# Altium PCB PCB_Motherboard_V1_2.PcbDoc
Units mm, origin at the board's own origin, x right, y up, seen from the top; angles counter-clockwise.
Board outline 110 x 145 mm, 2 copper layers (Top Layer, Bottom Layer), stack 1.58 mm thick; 101 components, 111 nets, 493 pads, 12 vias.
Unrouted connection lines stored in the file: 328.
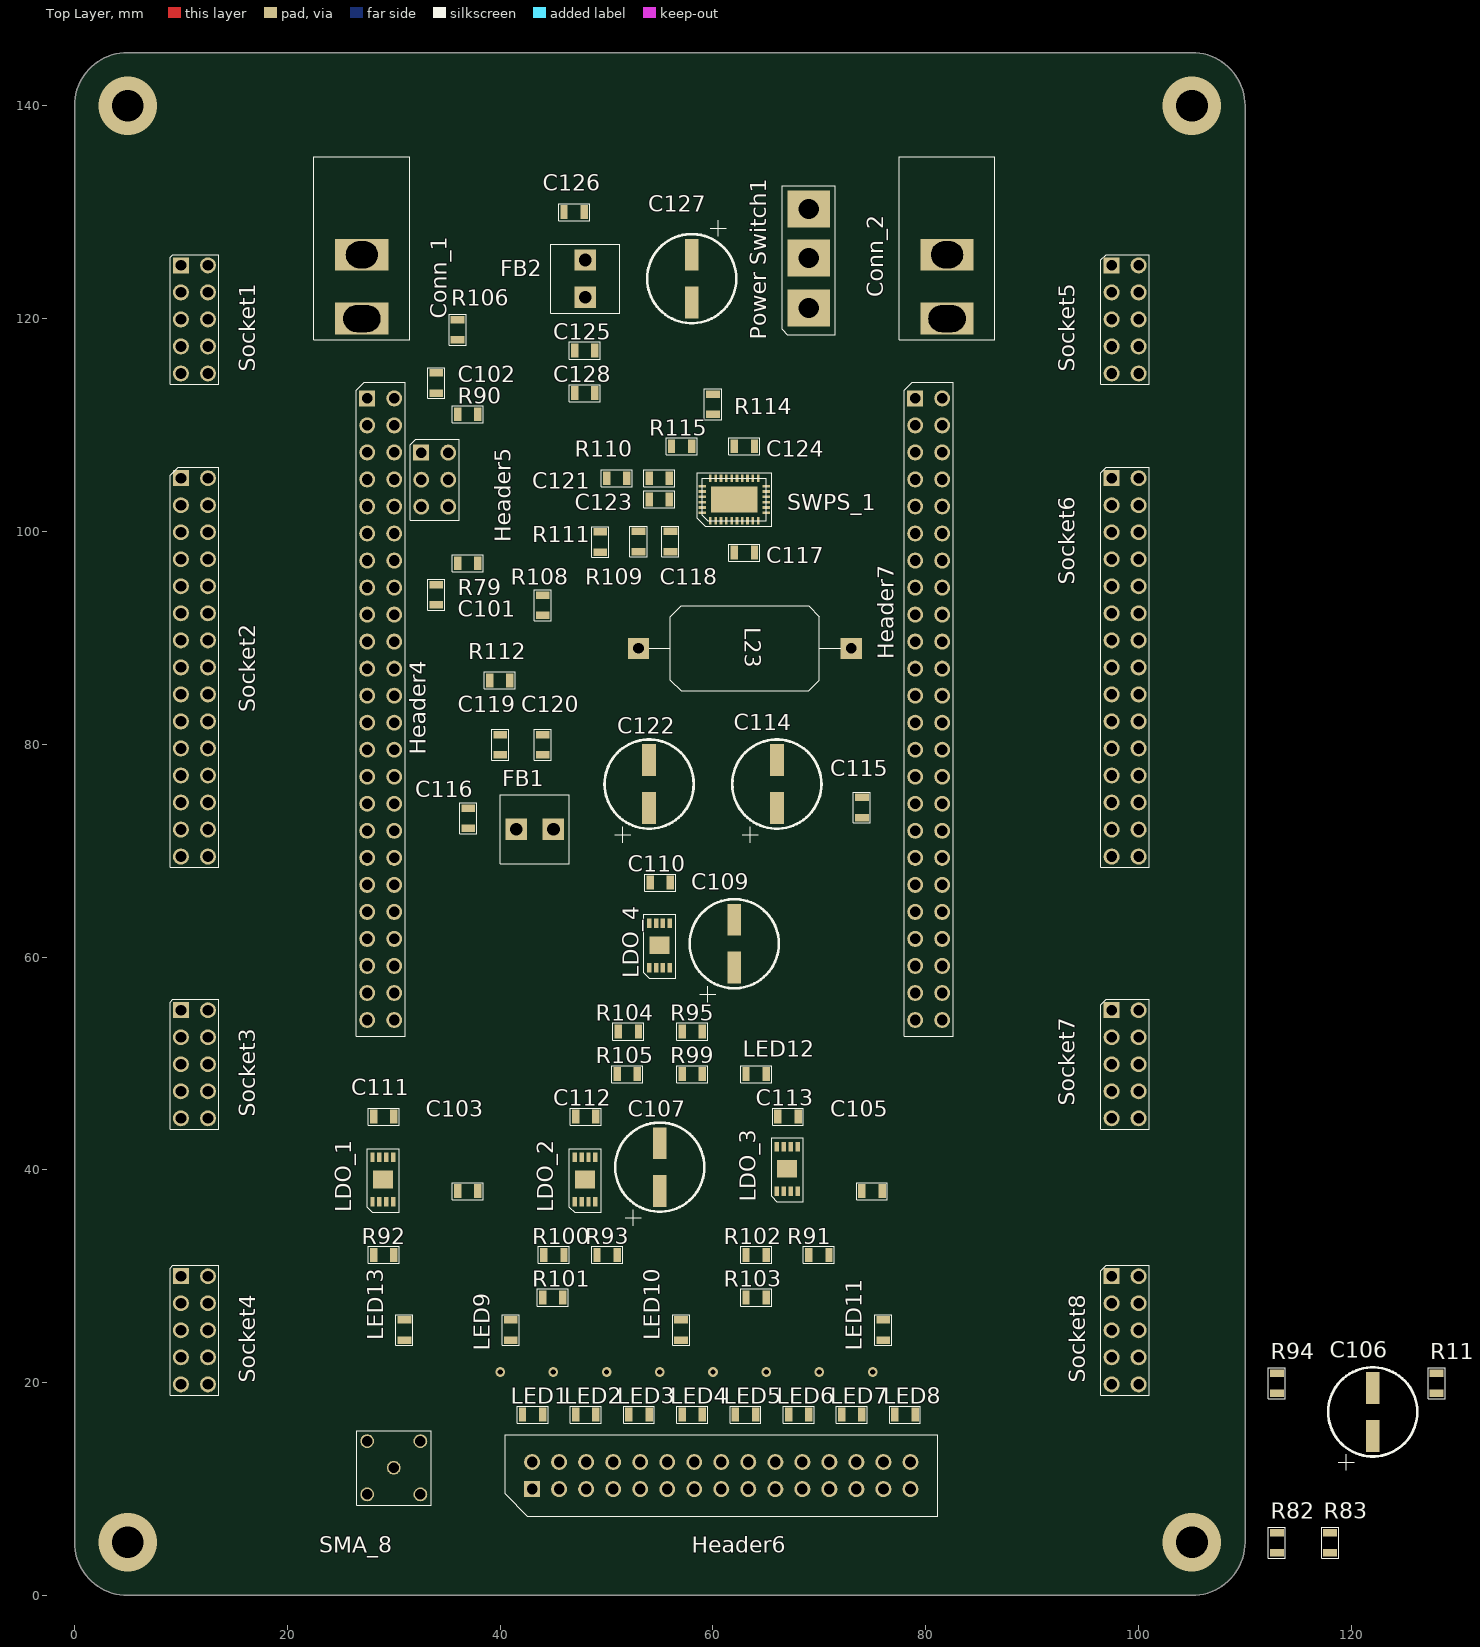
[diagram p0: Top Layer view]
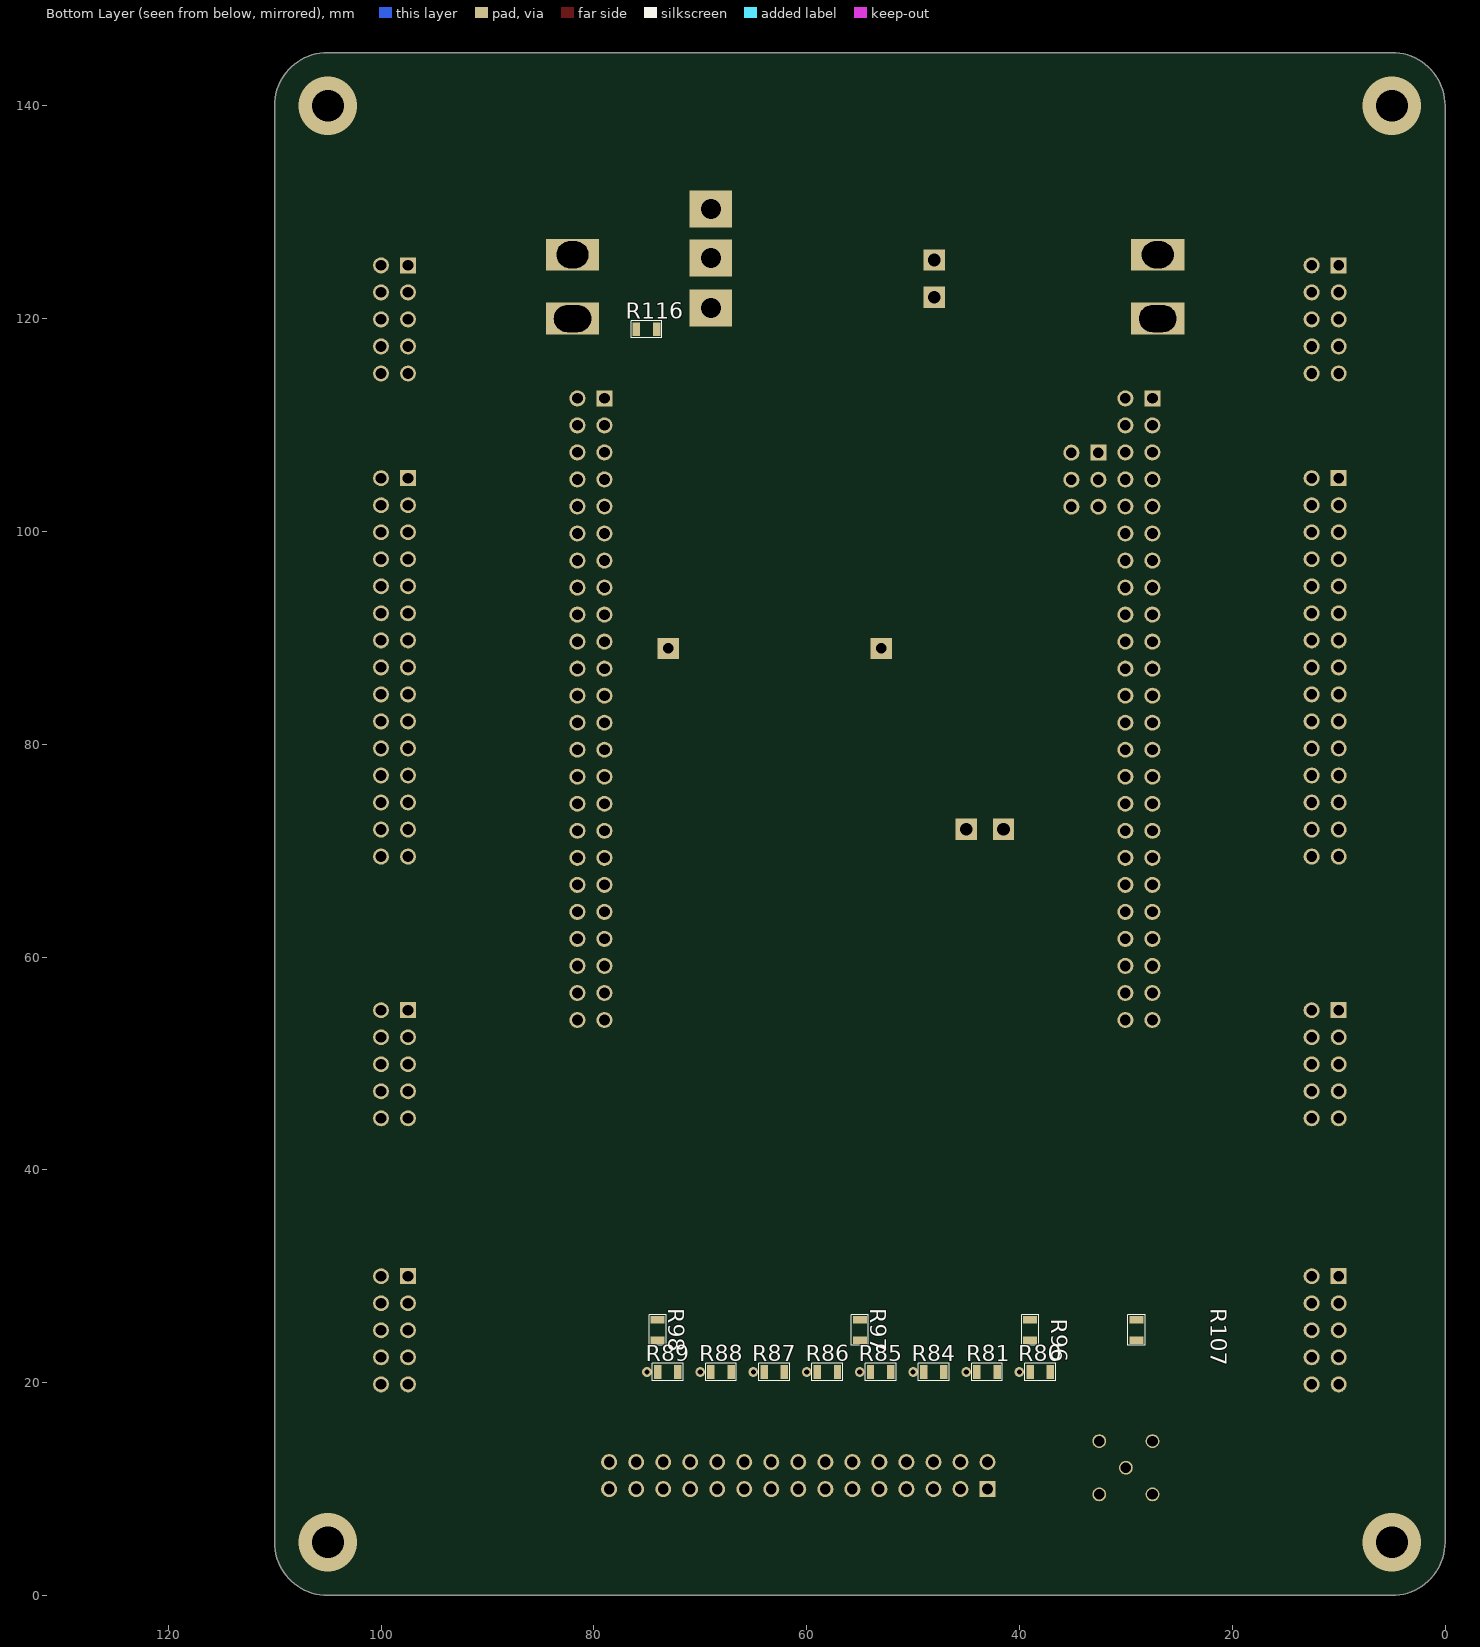
[diagram p1: Bottom Layer view, seen from below]

## Layer stack, top to bottom
Top Solder: solder mask 0.01, Solder Resist, Dk 3.5
Top Layer: signal copper 0.03
Dielectric 1: dielectric 1.52, FR-4, Dk 4.6
Bottom Layer: signal copper 0.03
Bottom Solder: solder mask 0.01, Solder Resist, Dk 3.5

## Board outline
0,5 ccw(c5,5) 5,0 105,0 ccw(c105,5) 110,5 110,140 ccw(c105,140) 105,145 5,145 ccw(c5,140) 0,140

## Design rules (kind name [scope] priority, off if disabled: settings)
Clearance [All] p1: gap=0.18
HoleSize [All] p1: absolutevalues=TRUE maxlimit=6 minlimit=0.3 maxpercent=80.000 minpercent=20.000
MinimumAnnularRing [All] p1: minimumring=0.18
PolygonConnect [All] p1: connectstyle=Relief reliefconductorwidth=0.254 reliefentries=4 polygonreliefangle="90 Angle" airgapwidth=0.254
RoutingTopology [All] p1: topology=Starburst
RoutingVias [All] p1: holewidth=0.4 width=0.8 viastyle="Through Hole" minholewidth=0.2 minwidth=0.52 maxholewidth=6 maxwidth=10
SolderMaskExpansion [All] p1: expansion=0.102
UnpouredPolygon [All] p1: allowunpoured=FALSE
Width [All] p1: maxlimit=10 minlimit=0.15 preferedwidth=0.3
27 further rules are at their usual default settings.

## Classes and differential pairs
net class DAC_DataBus: H_DAC_CLOCK H_DAC_DB0 H_DAC_DB1 H_DAC_DB2 H_DAC_DB3 H_DAC_DB4 H_DAC_DB5 H_DAC_DB6 H_DAC_DB7 H_DAC_DB8 H_DAC_DB9 H_DAC_DB10 H_DAC_DB11 H_DAC_DB12 H_DAC_DB13
net class ADC_DataBus: H_ADC_CLK H_ADC_D0 H_ADC_D1 H_ADC_D2 H_ADC_D3 H_ADC_D4 H_ADC_D5 H_ADC_D6 H_ADC_D7 H_ADC_D8 H_ADC_D9 H_ADC_D10
component class MotherBoard_PowerSupply: C103 C105 C107 C109 C110 C111 C112 C113 C114 C115 C116 C117 C118 C119 C120 C121 C122 C123 C124 C125 C126 C127 C128 Conn_1 Conn_2 FB1 FB2 L23 LDO_1 LDO_2 LDO_3 LDO_4 LED9 LED10 LED11 LED12 LED13 "Power Switch1" R91 R92 R93 R95 R96 R97 R98 R99 R100 R101 R102 R103 R104 R105 R106 R107 R108 R109 R110 R111 R112 R114 R115 R116 SWPS_1
component class MotherBoard_Interconnect: C101 C102 C103 C105 Header4 Header5 Header6 Header7 LED1 LED2 LED3 LED4 LED5 LED6 LED7 LED8 R79 R80 R81 R84 R85 R86 R87 R88 R89 R90 R91 SMA_8 Socket1 Socket2 Socket3 Socket4 Socket5 Socket6 Socket7 Socket8

## Components (designator, comment, footprint, x,y, rotation, side; value= is the part's Value field where it differs from the comment)
C101 "Cap1" "0805 SMD Passive" 34,95 r270 top
C102 "Cap1" "0805 SMD Passive" 34,113 r90 top
C103 "Cap1" "0805 SMD Passive" 36,38 r0 top
C105 "Cap1" "0805 SMD Passive" 74,38 r0 top
C106 "Cap2" ELKO_CAP 122,15 r0 top
C107 "Cap2" ELKO_CAP 55,38 r0 top
C109 "Cap2" ELKO_CAP 62,59 r0 top
C110 "Cap1" "0805 SMD Passive" 56,67 r180 top
C111 "Cap1" "0805 SMD Passive" 30,45 r180 top
C112 "Cap1" "0805 SMD Passive" 49,45 r180 top
C113 "Cap1" "0805 SMD Passive" 68,45 r180 top
C114 "Cap2" ELKO_CAP 66,74 r0 top
C115 "Cap1" "0805 SMD Passive" 74,75 r270 top
C116 "Cap1" "0805 SMD Passive" 37,74 r270 top
C117 "Cap1" "0805 SMD Passive" 62,98 r0 top
C118 "Cap1" "0805 SMD Passive" 56,100 r270 top
C119 "Cap1" "0805 SMD Passive" 40,79 r90 top
C120 "Cap1" "0805 SMD Passive" 44,79 r90 top
C121 "Cap1" "0805 SMD Passive" 50,105 r0 top
C122 "Cap2" ELKO_CAP 54,74 r0 top
C123 "Cap1" "0805 SMD Passive" 54,103 r0 top
C124 "Cap1" "0805 SMD Passive" 62,108 r0 top
C125 "Cap1" "0805 SMD Passive" 47,117 r0 top
C126 "Cap1" "0805 SMD Passive" 46,130 r0 top
C127 "Cap2" ELKO_CAP 58,126 r180 top
C128 "Cap1" "0805 SMD Passive" 47,113 r0 top
Conn_1 "DC_Connector" DC_Connector 27,120 r270 top
Conn_2 "DC_Connector" DC_Connector 82,120 r270 top
FB1 "Ferrit Bead" FerritBead 45,72 r90 top
FB2 "Ferrit Bead" FerritBead 48,122 r0 top
Header4 "Header2" Header2 27.5,112.5 r270 top
Header5 "Header4" Header4 32.58,107.4 r270 top
Header6 "Header1" Header1 43,10 r0 top
Header7 "Header2" Header2 79,112.5 r270 top
L23 "Inductor" THD_INDUCTOR 53,89 r0 top
LDO_1 "LTI1965" LT1965 28,37 r0 top
LDO_2 "LTI1965" LT1965 47,37 r0 top
LDO_3 "LTI1965" LT1965 66,38 r0 top
LDO_4 "LTI1965" LT1965 54,59 r0 top
LED1 "LED_Green" "0805 SMD Passive" 44,17 r180 top
LED2 "LED_Green" "0805 SMD Passive" 49,17 r180 top
LED3 "LED_Green" "0805 SMD Passive" 54,17 r180 top
LED4 "LED_Green" "0805 SMD Passive" 59,17 r180 top
LED5 "LED_Green" "0805 SMD Passive" 64,17 r180 top
LED6 "LED_Green" "0805 SMD Passive" 69,17 r180 top
LED7 "LED_Green" "0805 SMD Passive" 74,17 r180 top
LED8 "LED_Green" "0805 SMD Passive" 79,17 r180 top
LED9 "LED_Green" "0805 SMD Passive" 41,24 r90 top
LED10 "LED_Green" "0805 SMD Passive" 57,24 r90 top
LED11 "LED_Green" "0805 SMD Passive" 76,24 r90 top
LED12 "LED_Green" "0805 SMD Passive" 65,49 r180 top
LED13 "LED_Green" "0805 SMD Passive" 31,24 r90 top
"Power Switch1" "Switch" Switch 69,121 r0 top
R79 "Resistor" "0805 SMD Passive" 36,97 r0 top
R80 "Resistor" "0805 SMD Passive" 37.1,21 r0 bottom
R81 "Resistor" "0805 SMD Passive" 44,21 r180 bottom
R82 "Resistor" "0805 SMD Passive" 113,4 r90 top
R83 "Resistor" "0805 SMD Passive" 118,4 r90 top
R84 "Resistor" "0805 SMD Passive" 47.1,21 r0 bottom
R85 "Resistor" "0805 SMD Passive" 52.1,21 r0 bottom
R86 "Resistor" "0805 SMD Passive" 57.1,21 r0 bottom
R87 "Resistor" "0805 SMD Passive" 62.1,21 r0 bottom
R88 "Resistor" "0805 SMD Passive" 67.1,21 r0 bottom
R89 "Resistor" "0805 SMD Passive" 72.1,21 r0 bottom
R90 "Resistor" "0805 SMD Passive" 36,111 r0 top
R91 "Resistor" "0805 SMD Passive" 69,32 r0 top
R92 "Resistor" "0805 SMD Passive" 30,32 r180 top
R93 "Resistor" "0805 SMD Passive" 51,32 r180 top
R94 "Resistor" "0805 SMD Passive" 113,19 r90 top
R95 "Resistor" "0805 SMD Passive" 59,53 r180 top
R96 "Resistor" "0805 SMD Passive" 39,24 r90 bottom
R97 "Resistor" "0805 SMD Passive" 55,24 r90 bottom
R98 "Resistor" "0805 SMD Passive" 74,24 r90 bottom
R99 "Resistor" "0805 SMD Passive" 59,49 r180 top
R100 "Resistor" "0805 SMD Passive" 46,32 r180 top
R101 "Resistor" "0805 SMD Passive" 44,28 r0 top
R102 "Resistor" "0805 SMD Passive" 65,32 r180 top
R103 "Resistor" "0805 SMD Passive" 65,28 r180 top
R104 "Resistor" "0805 SMD Passive" 53,53 r180 top
R105 "Resistor" "0805 SMD Passive" 51,49 r0 top
R106 "Resistor" "0805 SMD Passive" 36,118 r90 top
R107 "Resistor" "0805 SMD Passive" 29,24 r90 bottom
R108 "Resistor" "0805 SMD Passive" 44,94 r270 top
R109 "Resistor" "0805 SMD Passive" 53,100 r270 top
R110 "Resistor" "0805 SMD Passive" 54,105 r0 top
R111 "Resistor" "0805 SMD Passive" 49.4,99.95 r270 top
R112 "Resistor" "0805 SMD Passive" 39,86 r0 top
R113 "Resistor" "0805 SMD Passive" 128,19 r90 top
R114 "Resistor" "0805 SMD Passive" 60,111 r90 top
R115 "Resistor" "0805 SMD Passive" 58,108 r180 top
R116 "Resistor" "0805 SMD Passive" 76,119 r180 bottom
SMA_8 "SMA_2" SMA_Board 30,12 r0 top
Socket1 "Socket3" Socket3_L 10,125 r270 top
Socket2 "Socket1" Socket1_L 10,105 r270 top
Socket3 "Socket3" Socket3_L 10,55 r270 top
Socket4 "Socket3" Socket3_L 10,30 r270 top
Socket5 "Socket3" Socket3_R 100,125 r270 top
Socket6 "Socket1" Socket1_R 100,105 r270 top
Socket7 "Socket3" Socket3_R 100,55 r270 top
Socket8 "Socket3" Socket3_R 100,30 r270 top
SWPS_1 "LT8646S" LT8646S 62,103 r0 top

## Footprints (in the part's own frame and the unit in brackets; to place one, negate y for a bottom-side part, rotate by r counter-clockwise, add the part's x,y. Pads: shape width x height; smd on the part's side, far side on the other; paste and mask are expansions set on the pad)
"0805 SMD Passive" [mm] "General 0805 SMD componenet footprint"
  rect 0.7x1.3 smd: 1(0,0) 2(1.9,0)
  silkscreen extent -0.5,-0.8 2.4,0.8, body extent -0.2,-0.6 2.1,0.6, height 0.45
DC_Connector [mm] "Power Connector"
  rect 3x5 hole 2.54 slot 3.5 at 90 deg: 1(0,0)
  rect 3x5 hole 2.54 slot 3 at 90 deg: 2(-6,0)
  silkscreen extent -15.2,-4.5 2,4.5, body extent -15.2,-4.5 0.5,4.5, height 10.46
ELKO_CAP [mm] "Electrolit SMD capacitor"
  rect 1.3x3 smd: 1(0,0) 2(0,4.5)
  silkscreen extent -4.19,-3.25 4.19,6.44, body extent -2.48,0.01 2.5,5, height 5.4
FerritBead [mm] "THD"
  rect 2x2 hole 1.2: 1(0,0) 2(0,3.5)
  silkscreen extent -3.25,-1.5 3.25,5, body extent -2.98,-1.24 3,4.74, height 10
Header1 [mm] "30-Pin DIL"
  rect 1.5x1.5 hole 1: 1(0,0)
  round 1.5 hole 1: 2(0,2.54) 3(2.54,0) 4(2.54,2.54) 5(5.08,0) 6(5.08,2.54) 7(7.62,0) 8(7.62,2.54) 9(10.16,0) 10(10.16,2.54) 11(12.7,0) 12(12.7,2.54) 13(15.24,0) 14(15.24,2.54) 15(17.78,0) 16(17.78,2.54) 17(20.32,0) 18(20.32,2.54) 19(22.86,0) 20(22.86,2.54) 21(25.4,0) 22(25.4,2.54) 23(27.94,0) 24(27.94,2.54) 25(30.48,0) 26(30.48,2.54) 27(33.02,0) 28(33.02,2.54) 29(35.56,0) 30(35.56,2.54)
  silkscreen extent -2.54,-2.54 38.1,5.08, body extent -1.5,-2 37.5,4.5, height 8
Header2 [mm] "48-Pin DIL"
  rect 1.5x1.5 hole 1: 1(0,0)
  round 1.5 hole 1: 2(2.54,0) 3(5.08,0) 4(7.62,0) 5(10.16,0) 6(12.7,0) 7(15.24,0) 8(17.78,0) 9(20.32,0) 10(22.86,0) 11(25.4,0) 12(27.94,0) 13(30.48,0) 14(33.02,0) 15(35.56,0) 16(38.1,0) 17(40.64,0) 18(43.18,0) 19(45.72,0) 20(48.26,0) 21(50.8,0) 22(53.34,0) 23(55.88,0) 24(58.42,0) 25(0,2.54) 26(2.54,2.54) 27(5.08,2.54) 28(7.62,2.54) 29(10.16,2.54) 30(12.7,2.54) 31(15.24,2.54) 32(17.78,2.54) 33(20.32,2.54) 34(22.86,2.54) 35(25.4,2.54) 36(27.94,2.54) 37(30.48,2.54) 38(33.02,2.54) 39(35.56,2.54) 40(38.1,2.54) 41(40.64,2.54) 42(43.18,2.54) 43(45.72,2.54) 44(48.26,2.54) 45(50.8,2.54) 46(53.34,2.54) 47(55.88,2.54) 48(58.42,2.54)
  silkscreen extent -1.5,-1.02 59.94,3.56, body extent -1.5,-1.02 60,3.56, height 8
Header4 [mm] "6-Pin DIL"
  rect 1.5x1.5 hole 1: 1(0,0)
  round 1.5 hole 1: 2(0,2.54) 3(2.54,0) 4(2.54,2.54) 5(5.08,0) 6(5.08,2.54)
  silkscreen extent -1.27,-1.02 6.35,3.56, body extent -1.27,-1.02 6.35,3.56, height 8
LT1965 [mm] "MSOP-8"
  rect 0.42x0.89 smd: 1(0,0) 2(0.65,0) 3(1.3,0) 4(1.95,0) 5(1.95,4.19) 6(1.3,4.19) 7(0.65,4.19) 8(0,4.19)
  rect 1.88x1.68 smd: 9(0.975,2.1)
  silkscreen extent -0.5,-1 2.5,5, body extent -0.1,0.7 2,3.4, height 1.5
LT8646S [mm] "LQFN-32"
  rect 0.25x0.7 smd: 1(-2.25,-2) 2(-1.75,-2) 3(-1.25,-2) 4(-0.75,-2) 5(-0.25,-2) 6(0.25,-2) 7(0.75,-2) 8(1.25,-2) 9(1.75,-2) 10(2.25,-2) 17(2.25,2) 18(1.75,2) 19(1.25,2) 20(0.75,2) 21(0.25,2) 22(-0.25,2) 23(-0.75,2) 24(-1.25,2) 25(-1.75,2) 26(-2.25,2)
  rect 0.7x0.25 smd: 11(3,-1.25) 12(3,-0.75) 13(3,-0.25) 14(3,0.25) 15(3,0.75) 16(3,1.25) 27(-3,1.25) 28(-3,0.75) 29(-3,0.25) 30(-3,-0.25) 31(-3,-0.75) 32(-3,-1.25)
  rect 4.4x2.45 smd: 33(0,0)
  silkscreen extent -3.5,-2.5 3.5,2.5, body extent -3,-2 3,2, height 0.2
SMA_Board [mm] "SMD THD connector"
  round 1.3 hole 1: 1(0,0) 2(-2.5,-2.5) 2(-2.5,2.5) 2(2.5,-2.5) 2(2.5,2.5)
  silkscreen extent -3.5,-3.5 3.5,3.5, body extent -3.5,-3.5 3.5,3.5, height 8
Socket1_L [mm] "30-Pin DIL"
  rect 1.5x1.5 hole 1: 1(0,0)
  round 1.5 hole 1: 2(0,2.54) 3(2.54,0) 4(2.54,2.54) 5(5.08,0) 6(5.08,2.54) 7(7.62,0) 8(7.62,2.54) 9(10.16,0) 10(10.16,2.54) 11(12.7,0) 12(12.7,2.54) 13(15.24,0) 14(15.24,2.54) 15(17.78,0) 16(17.78,2.54) 17(20.32,0) 18(20.32,2.54) 19(22.86,0) 20(22.86,2.54) 21(25.4,0) 22(25.4,2.54) 23(27.94,0) 24(27.94,2.54) 25(30.48,0) 26(30.48,2.54) 27(33.02,0) 28(33.02,2.54) 29(35.56,0) 30(35.56,2.54)
  silkscreen extent -1.02,-1.02 36.58,3.56, body extent -1.02,-1.02 36.58,3.56, height 6
Socket1_R [mm] "30-Pin DIL"
  rect 1.5x1.5 hole 1: 1(0,-2.54)
  round 1.5 hole 1: 2(0,0) 3(2.54,-2.54) 4(2.54,0) 5(5.08,-2.54) 6(5.08,0) 7(7.62,-2.54) 8(7.62,0) 9(10.16,-2.54) 10(10.16,0) 11(12.7,-2.54) 12(12.7,0) 13(15.24,-2.54) 14(15.24,0) 15(17.78,-2.54) 16(17.78,0) 17(20.32,-2.54) 18(20.32,0) 19(22.86,-2.54) 20(22.86,0) 21(25.4,-2.54) 22(25.4,0) 23(27.94,-2.54) 24(27.94,0) 25(30.48,-2.54) 26(30.48,0) 27(33.02,-2.54) 28(33.02,0) 29(35.56,-2.54) 30(35.56,0)
  silkscreen extent -1.02,-3.56 36.58,1.02, body extent -1.02,-3.56 36.58,1.02, height 6
Socket3_L [mm] "10-Pin DIL"
  rect 1.5x1.5 hole 1: 1(0,0)
  round 1.5 hole 1: 2(0,2.54) 3(2.54,0) 4(2.54,2.54) 5(5.08,0) 6(5.08,2.54) 7(7.62,0) 8(7.62,2.54) 9(10.16,0) 10(10.16,2.54)
  silkscreen extent -1.02,-1.02 11.18,3.56, body extent -1.02,-1.02 11.18,3.56, height 6
Socket3_R [mm] "10-Pin DIL"
  rect 1.5x1.5 hole 1: 1(0,-2.54)
  round 1.5 hole 1: 2(0,0) 3(2.54,-2.54) 4(2.54,0) 5(5.08,-2.54) 6(5.08,0) 7(7.62,-2.54) 8(7.62,0) 9(10.16,-2.54) 10(10.16,0)
  silkscreen extent -1.02,-3.56 11.18,1.02, body extent -1.02,-3.56 11.18,1.02, height 6
Switch [mm] "3 position switch"
  rect 4x3.5 hole 1.9: 1(0,0) 2(0,4.7) 3(0,9.3)
  silkscreen extent -2.5,-2.5 2.5,11.5, body extent -1.5,-1.5 1.5,10.5, height 13.95
THD_INDUCTOR [mm]
  rect 2x2 hole 1: 1(0,0) 2(20,0)
  silkscreen extent 1,-4 19,4, body extent -0.5,-3 20.5,2.99, height 5.98

## Part data
C101 C102 C103 C105 C110 C111 C112 C113 C115 C116 C117 C118 C119 C120 C121 C123 C124 C125 C126 C128: "SMD Capacitor"
C106 C107 C109 C114 C122 C127: "SMD Polarized Capacitor"
Conn_1 Conn_2: "Coaxial DC connector - female"
FB1 FB2: library part FerritBead
Header4 Header7: "48 Pin Header"
Header5: "6pin DIL header"
Header6: "29 Pin Header"
L23: library part Ind1, "SMD Inductor"
LDO_1 LDO_2 LDO_3 LDO_4: "Low Dropout Linear Regulator"
LED1 LED2 LED3 LED4 LED5 LED6 LED7 LED8 LED9 LED10 LED11 LED12 LED13: "Diode"
"Power Switch1": "3 state switch"
R79 R80 R81 R82 R83 R84 R85 R86 R87 R88 R89 R90 R91 R92 R93 R94 R95 R96 R97 R98 R99 R100 R101 R102 R103 R104 R105 R106 R107 R108 R109 R110 R111 R112 R113 R114 R115 R116: library part Res1, "SMD Resistor"
SMA_8: "SMA Female"
Socket1 Socket3 Socket4 Socket5 Socket7 Socket8: "10 Pin Socket"
Socket2 Socket6: "30 Pin Socket"
SWPS_1: "Step-Down Silent Switcher Power Supply"

## Via types
v1: diameter 0.9, hole 0.5, Top Layer to Bottom Layer, 8 vias
v2: diameter 5.5, hole 3, Top Layer to Bottom Layer, 4 vias

## Nets (pads, with @x,y where several pads share a name; then routed paths per layer and width w, separated by ;. In a path a pad name is that pad's centre, name@x,y a point inside that pad or via, vN(x,y) a via of type N, cw(c..) or ccw(c..) an arc to the next point about the centre after c; other vN are vias at no path point)
3.3V: C103.1 LDO_1.3 LED9.2 R92.1 Socket1.1 Socket2.7 Socket2.9 Socket2.11 Socket2.23 Socket2.25 Socket2.27 Socket3.1 Socket3.3 Socket4.1 Socket5.1 Socket6.4 Socket6.6 Socket6.8 Socket6.26 Socket6.28 Socket6.30 Socket7.1 Socket7.3 Socket8.1 Socket8.3
5V_AMP: C109.1 LED12.2 R95.1 Socket4.6 Socket4.8 Socket4.10 Socket8.6 Socket8.8 Socket8.10
5V_RX: C107.1 LED10.2 R93.1 Socket3.2 Socket3.4 Socket5.7 Socket5.9 Socket7.2 Socket7.4
5V_TX: C105.1 LED11.2 R91.1 Socket1.7 Socket1.9
19V: C124.1 C125.2 C128.2 FB2.1 R115.1 SWPS_1.21 SWPS_1.22 SWPS_1.23
19V_IN: C117.1 SWPS_1.4 SWPS_1.5 SWPS_1.6
ADC_POWERDOWN: Header7.2 Socket6.5
DAC_MODE: Header4.6 Socket2.5
DAC_SLEEP: Header4.5 Socket2.3
DC_IN: Conn_2.1 R116.1
FB: C118.1 R109.1 R111.1 SWPS_1.32
FPGA_IN: C116.2 FB1.2 LED13.2 R106.2 R112.1
FPGA_POWER: Conn_1.1 R106.1
FWP_DETECTOR: Header5.4
GND: C101.2 C102.2 C103.2 C105.2 C107.2 C109.2 C110.1 C111.1 C112.1 C113.1 C114.2 C115.1 C116.1 C117.2 C119.2 C120.2 C121.1 C122.2 C123.1 C124.2 C125.1 C126.1 C127.2 C128.1 Conn_1.2 Conn_2.2 Header4.1 Header4.3 Header4.7 Header4.13 Header4.23 Header4.37 Header4.47 Header5.1 Header5.3 Header5.5 Header6.1 Header6.3 Header6.5 Header6.7 Header6.9 Header6.11 Header6.13 Header6.15 Header6.17 Header6.19 Header6.21 Header6.23 Header6.25 Header6.27 Header6.29 Header7.12 Header7.13 Header7.24 Header7.25 Header7.36 Header7.37 Header7.48 LDO_1.4 LDO_1.5 LDO_1.9 LDO_2.4 LDO_2.5 LDO_2.9 LDO_3.4 LDO_3.5 LDO_3.9 LDO_4.4 LDO_4.5 LDO_4.9 LED1.1 LED2.1 LED3.1 LED4.1 LED5.1 LED6.1 LED7.1 LED8.1 R96.2 R97.2 R98.2 R99.2 R101.1 R103.1 R105.1 R107.2 R111.2 R114.2 SMA_8.2 Socket1.3 Socket1.5 Socket2.13 Socket2.15 Socket2.17 Socket2.19 Socket2.21 Socket3.5 Socket3.7 Socket4.5 Socket4.7 Socket4.9 Socket5.3 Socket5.5 Socket6.12 Socket6.14 Socket6.16 Socket6.18 Socket6.20 Socket6.22 Socket7.5 Socket7.7 Socket8.5 Socket8.7 Socket8.9 SWPS_1.8 SWPS_1.9 SWPS_1.10 SWPS_1.17 SWPS_1.18 SWPS_1.19 SWPS_1.33
H_ADC_CLK: Header7.39 Socket6.29
H_ADC_D0: Header7.38 Socket6.27
H_ADC_D1: Header7.35 Socket6.25
H_ADC_D2: Header7.34 Socket6.23
H_ADC_D3: Header7.33 Socket6.21
H_ADC_D4: Header7.32 Socket6.19
H_ADC_D5: Header7.31 Socket6.17
H_ADC_D6: Header7.30 Socket6.15
H_ADC_D7: Header7.29 Socket6.13
H_ADC_D8: Header7.28 Socket6.11
H_ADC_D9: Header7.27 Socket6.9
H_ADC_D10: Header7.26 Socket6.7
H_ADC_OR: Header7.3 Socket6.3
H_DAC_CLOCK: Header4.32 Socket2.2
H_DAC_DB0: Header4.22 Socket2.30
H_DAC_DB1: Header4.21 Socket2.28
H_DAC_DB2: Header4.20 Socket2.26
H_DAC_DB3: Header4.19 Socket2.24
H_DAC_DB4: Header4.18 Socket2.22
H_DAC_DB5: Header4.17 Socket2.20
H_DAC_DB6: Header4.16 Socket2.18
H_DAC_DB7: Header4.15 Socket2.16
H_DAC_DB8: Header4.14 Socket2.14
H_DAC_DB9: Header4.12 Socket2.12
H_DAC_DB10: Header4.11 Socket2.10
H_DAC_DB11: Header4.10 Socket2.8
H_DAC_DB12: Header4.9 Socket2.6
H_DAC_DB13: Header4.8 Socket2.4
INPUTDETECTOR: Header5.2
LDO_IN: C110.2 C111.2 C112.2 C113.2 C114.1 C115.2 FB1.1 LDO_1.7 LDO_1.8 LDO_2.7 LDO_2.8 LDO_3.7 LDO_3.8 LDO_4.7 LDO_4.8
NetC102_1: Socket4.2
NetC103_1: Socket4.4
NetC121_2: C121.2 R110.1
NetC123_2: C123.2 SWPS_1.29
NetC126_2: "Power Switch1.2" C126.2 C127.1 FB2.2
NetHeader4_34: Header4.34
NetLDO_1_1: LDO_1.1 LDO_1.2 R92.2
NetLDO_2_1: LDO_2.1 LDO_2.2 R93.2 R100.2
NetLDO_2_3: LDO_2.3 R100.1 R101.2
NetLDO_3_1: LDO_3.1 LDO_3.2 R91.2 R102.2
NetLDO_3_3: LDO_3.3 R102.1 R103.2
NetLDO_4_1: LDO_4.1 LDO_4.2 R95.2 R104.2
NetLDO_4_3: LDO_4.3 R104.1 R105.2
NetLED1_2: LED1.2 R80.2
NetLED2_2: LED2.2 R81.2
NetLED3_2: LED3.2 R84.2
NetLED4_2: LED4.2 R85.2
NetLED5_2: LED5.2 R86.2
NetLED6_2: LED6.2 R87.2
NetLED7_2: LED7.2 R88.2
NetLED8_2: LED8.2 R89.2
NetLED9_1: LED9.1 R96.1
NetLED10_1: LED10.1 R97.1
NetLED11_1: LED11.1 R98.1
NetLED12_1: LED12.1 R99.1
NetLED13_1: LED13.1 R107.1
"NetPower Switch1_1": "Power Switch1.1" R116.2
NetR79_2: R79.2 Socket3.9
NetR90_2: R90.2 Socket7.9
NetR91_2: Socket8.2
NetR109_2: R109.2
NetR113_2: R110.2 SWPS_1.30
NetR114_1: R114.1 SWPS_1.26
NetR115_2: R115.2 SWPS_1.25
PAM_BIAS: Header4.43 Socket4.3
PG: LDO_1.6 LDO_2.6 LDO_3.6 LDO_4.6 R108.1 SWPS_1.31
RWP_DETECTOR: Header5.6
RX_ATT_LE: Header7.46 Socket7.10
RX_ATT_SCLK: Header7.44 Socket7.6
RX_ATT_SI: Header7.45 Socket7.8
RX_AUX_REF_CLK: Header7.4 Socket5.2
RX_SYTH_DATA: Header7.7 Socket5.8
RX_SYTH_LE: Header7.8 Socket5.10
RX_SYTH_MUX: Header7.5 Socket5.4
RX_SYTH_SCLK: Header7.6 Socket5.6
RXDETECTOR: C102.1 Header4.27 R90.1
SPREADSPECTRUM: SWPS_1.2 SWPS_1.28
TP_1: Header4.42 Header6.2 R80.1 SMA_8.1
TP_2: Header4.41 Header6.6 R81.1
TP_3: Header4.40 Header6.10 R84.1
TP_4: Header4.39 Header6.14 R85.1
TP_5: Header6.18 Header7.15 R86.1
TP_6: Header6.22 Header7.16 R87.1
TP_7: Header6.26 Header7.17 R88.1
TP_8: Header6.30 Header7.18 R89.1
TX_ATT_LE: Header4.46 Socket3.10
TX_ATT_SCLK: Header4.44 Socket3.6
TX_ATT_SI: Header4.45 Socket3.8
TX_AUX_REF_CLK: Header4.29 Socket1.2
TX_SYTH_DATA: Header4.2 Socket1.8
TX_SYTH_LE: Header4.4 Socket1.10
TX_SYTH_MUX: Header4.28 Socket1.4
TX_SYTH_SCLK: Header4.26 Socket1.6
TXDETECTOR: C101.1 Header4.31 R79.1
VOUT_6V: C118.2 C119.1 C120.1 C122.1 L23.1 R108.2 R112.2 SWPS_1.1
VOUT_SW: L23.2 SWPS_1.12 SWPS_1.13 SWPS_1.14 SWPS_1.15 SWPS_1.16
pads on no net: "Power Switch1.3" C106.1 C106.2 Header4.24 Header4.25 Header4.30 Header4.33 Header4.35 Header4.36 Header4.38 Header4.48 Header6.4 Header6.8 Header6.12 Header6.16 Header6.20 Header6.24 Header6.28 Header7.1 Header7.9 Header7.10 Header7.11 Header7.14 Header7.19 Header7.20 Header7.21 Header7.22 Header7.23 Header7.40 Header7.41 Header7.42 Header7.43 Header7.47 R82.1 R82.2 R83.1 R83.2 R94.1 R94.2 R113.1 R113.2 Socket2.1 Socket2.29 Socket6.1 Socket6.2 Socket6.10 Socket6.24 Socket8.4 SWPS_1.3 SWPS_1.7 SWPS_1.11 SWPS_1.20 SWPS_1.24 SWPS_1.27
copper on no net:
  other v1: 40,21 45,21 50,21 55,21 60,21 65,21 70,21 75,21
  other v2: 5,5 105,5 5,140 105,140

## Silkscreen, mask and mechanical layers (free items; w line width, h text height)
Mechanical 1:
  the board outline again, w0.1
Mechanical 2:
  lines w0.1: -10,-9 ccw(c-5,-9) -5,-14 115,-14 ccw(c115,-9) 120,-9 120,154 ccw(c115,154) 115,159 -5,159 ccw(c-5,154) -10,154 -10,-9 ; 6,11 ccw(c11,11) 11,6 99,6 ccw(c99,11) 104,11 104,134 ccw(c99,134) 99,139 11,139 ccw(c11,134) 6,134 6,11